# Altium PCB Day10F206.PCBDOC
Units mm, origin at the board's own origin, x right, y up, seen from the top; angles counter-clockwise.
Board outline 152.4 x 101.6 mm, 2 copper layers (Top Layer, Bottom Layer); 39 components, 22 nets, 97 pads, 0 vias.
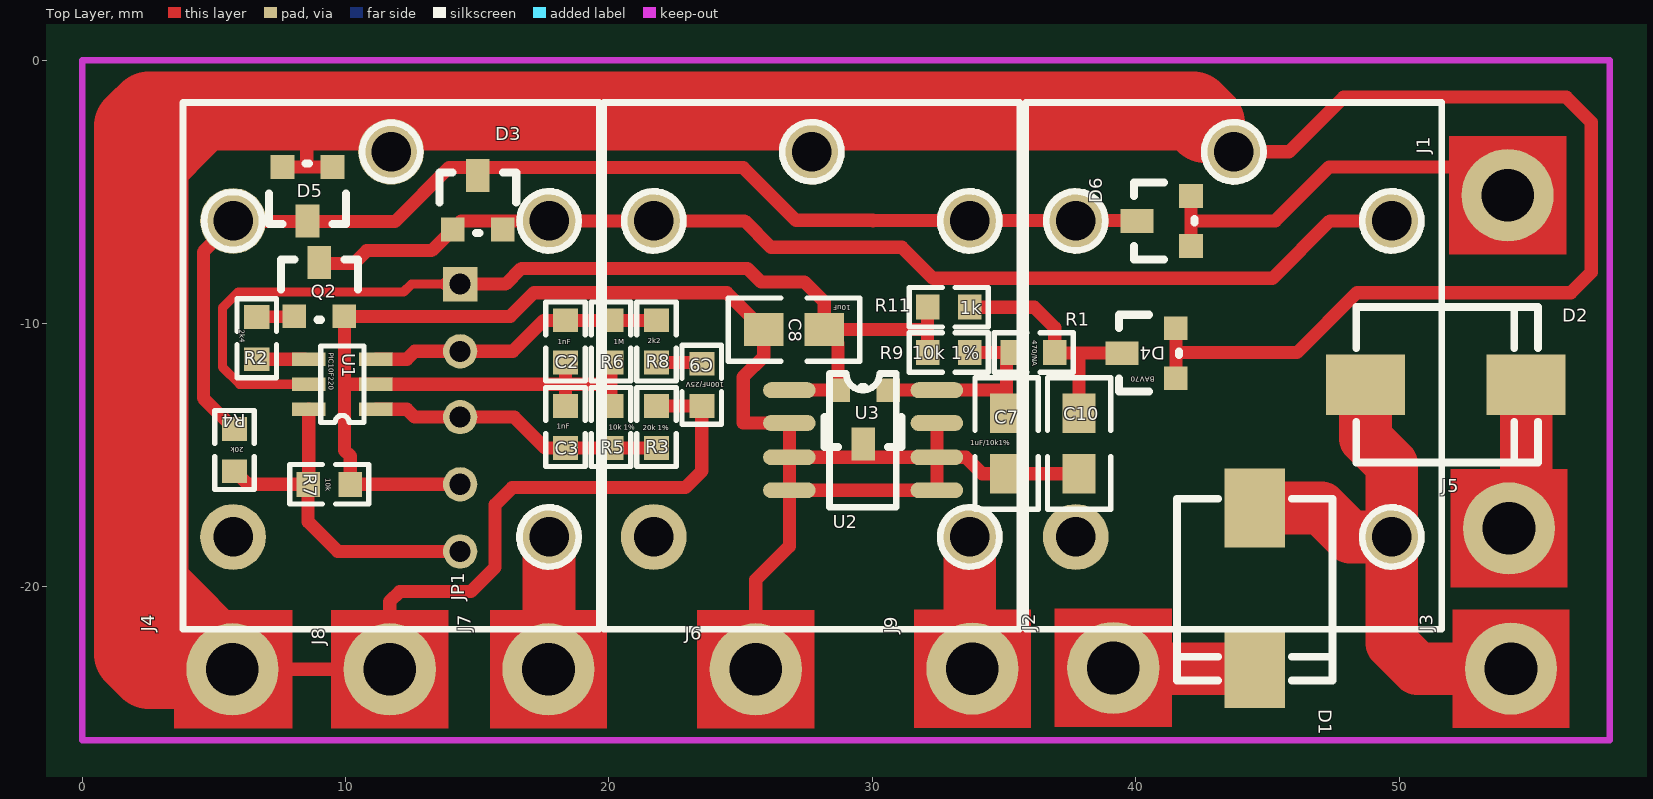
[diagram p0: Top Layer view]
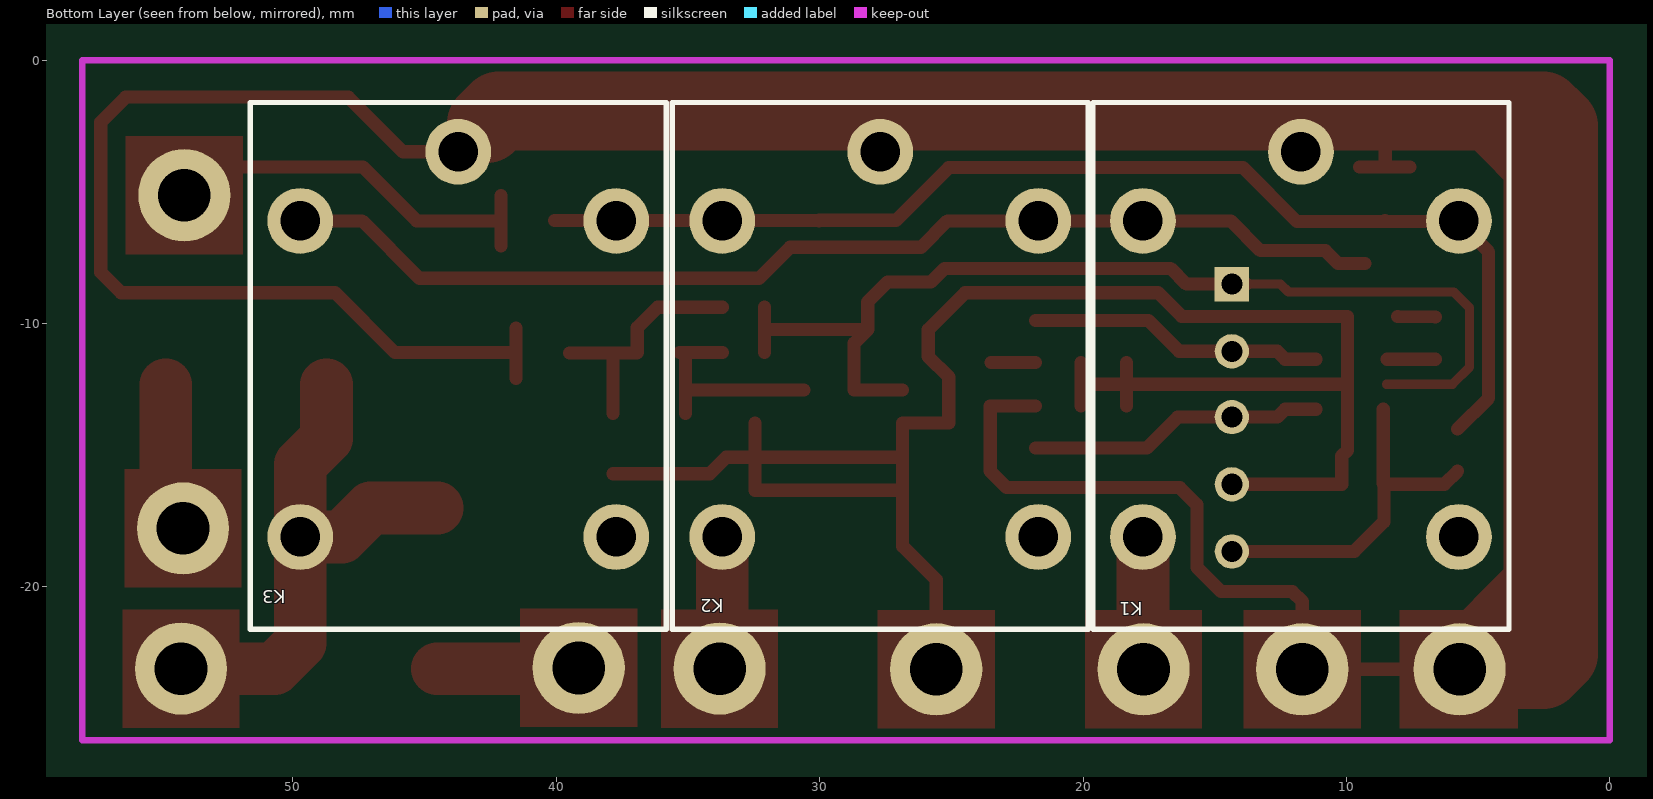
[diagram p1: Bottom Layer view, seen from below]

## Layer stack, top to bottom
Top Layer: signal copper 0.0356
Dielectric: dielectric 0.32, FR-4, Dk 4.8
Bottom Layer: signal copper 0.0356

## Board outline
-23.725,-60.75 128.675,-60.75 128.675,40.85 -23.725,40.85

## Design rules (kind name [scope] priority, off if disabled: settings)
Clearance [All] p1: gap=0.3
ComponentClearance [All] p1 off: gap=0 collisioncheckmode=3 verticalgap=0.254 showdistances=FALSE
FabricationTestPointUsage TestPointUsage [All] p1: valid=0 allowmultiple=FALSE
FabricationTestpoint Testpoint [All] p1: side=3 testpointundercomponent=TRUE minsize=1.016 maxsize=2.54 preferedsize=1.524 minholesize=0 maxholesize=1.016 preferedholesize=0.813 testpointgrid=0.025 allowsidetop=TRUE allowsidebottom=TRUE usegrid=TRUE gridtolerance=0
PolygonConnect [All] p1: connectstyle=Relief reliefconductorwidth=0.254 reliefentries=4 polygonreliefangle="90 Angle"
RoutingVias [All] p1: holewidth=0.711 width=1.27 viastyle="Through Hole" minholewidth=0.711 minwidth=1.27 maxholewidth=0.711 maxwidth=1.27
SilkscreenOverComponentPads [All] p1: minsilkscreentomaskgap=0.254
SolderMaskExpansion [All] p1: expansion=0.102
Width [All] p1: maxlimit=3 minlimit=0.25 preferedwidth=0.35 bottomlayer_prefwidth=0.25 minimp=50.000000 maximp=50.000000 favimp=50.000000
24 further rules are at their usual default settings.

## Components (designator, comment, footprint, x,y, rotation, side; value= is the part's Value field where it differs from the comment)
C2 "1nF" 0603 18.35,-10.675 r270 top
C3 "1nF" 0603 18.35,-13.925 r270 top
C7 "1uF/10k1%" 0805 35.1,-13.4 r270 top
C8 "10uF" 0805 28.175,-10.225 r180 top
C9 "100nF/25V" 0603 23.525,-12.325 r90 top
C10 "1uF/25V" 0805 37.85,-13.4 r270 top (schematic designator C?)
D1 "DIODE" SMC 44.525,-23.1 r270 top
D2 "DIODE" SMC 54.825,-12.325 r0 top
D3 "BAV70" SOT-23 14.065,-6.425 r0 top
D4 "BAV70" SOT-23 41.525,-12.075 r90 top
D5 "BAV70" SOT-23 9.5,-4.05 r180 top
D6 "BAV70" SOT-23 42.1,-7.05 r90 top
J1 "CON1" "SIP1 - WIRE" 54.125,-5.125 r180 top
J2 "CON1" "SIP1 - WIRE" 39.15,-23.075 r180 top
J3 "CON1" "SIP1 - WIRE" 54.25,-23.1 r180 top
J4 "CON1" "SIP1 - WIRE" 5.7,-23.125 r180 top
J5 "CON1" "SIP1 - WIRE" 54.175,-17.775 r90 top (schematic designator J?)
J6 "CON1" "SIP1 - WIRE" 25.575,-23.125 r90 top (schematic designator J?)
J7 "CON1" "SIP1 - WIRE" 17.7,-23.125 r180 top
J8 "CON1" "SIP1 - WIRE" 11.675,-23.125 r180 top
J9 "CON1" "SIP1 - WIRE" 33.8,-23.1 r180 top
JP1 "HEADER 5" "SIP5 - PGM" 14.35,-8.5 r270 top
K1 "RELAY-LF" RELAY5PIN 17.725,-6.1 r180 bottom
K2 "RELAY-RF" RELAY5PIN 33.7,-6.1 r180 bottom
K3 "RELAY-GABARIT" RELAY5PIN 49.725,-6.1 r180 bottom
Q2 "MMBT2222A" SOT-23 8.05,-9.725 r0 top (schematic designator Q?)
R1 "470/NA" 0603 36.125,-11.1 r0 top
R2 "2k4" 0603 6.625,-10.55 r270 top
R3 "20k 1%" 0603 21.8,-13.925 r270 top
R4 "20k" 0603 5.775,-14.8 r90 top
R5 "10k 1%" 0603 20.075,-13.925 r270 top
R6 "1M" 0603 20.075,-10.675 r90 top
R7 "10k" 0603 9.375,-16.1 r180 top
R8 "2k2" 0603 21.8,-10.675 r270 top
R9 "10k 1%" 0603 32.9,-11.1 r180 top
R11 "1k" 0603 32.9,-9.375 r0 top
U1 "PIC10F220" "SOT23 - 6" 11.15,-13.25 r90 top
U2 "VOLTREG" "SO-8 VOLTREG" 26.85,-12.525 r0 top
U3 "TL431" SOT-23 30.6,-12.525 r180 top (schematic designator U?)

## Footprints (in the part's own frame and the unit in brackets; to place one, negate y for a bottom-side part, rotate by r counter-clockwise, add the part's x,y. Pads: shape width x height; smd on the part's side, far side on the other; paste and mask are expansions set on the pad)
0603 [mm]
  rect 0.9x0.95 smd: 1(-0.8,0) 2(0.8,0)
  silkscreen extent -1.5,-0.75 1.5,0.75
0805 [mm]
  rect 1.5x1.25 smd: 1(0,0) 2(2.3,0)
  silkscreen extent -1.35,-1.2 3.65,1.2
RELAY5PIN [mm]
  round 2.5 hole 1.5: 1(6,2.625) 2(0,-12) 3(12,-12) 4(12,0) 5(0,0)
  silkscreen extent -1.9,-15.5 13.9,4.5
"SIP1 - WIRE" [mm]
  round 3.5 hole 2: 1(0,0)
"SIP5 - PGM" [mm]
  rect 1.3x1.3 hole 0.8: 1(0,0)
  round 1.3 hole 0.8: 2(2.55,0) 3(5.05,0) 4(7.6,0) 5(10.15,0)
SMC [mm]
  rect 3x2.3 smd: 1(0,0) 2(-6.1,0)
  silkscreen extent -6.45,-2.95 0.45,2.95
"SO-8 VOLTREG" [mm]
  oval 2x0.6 smd: 1(5.6,0) 2(0,-3.8) 2(0,-2.55) 2(0,-1.25) 2(5.6,-3.8) 2(5.6,-2.55) 2(5.6,-1.25) 3(0,0)
  silkscreen extent 1.52,-4.44 4.06,0.64
"SOT23 - 6" [mm]
  rect 0.508x1.27 smd: 1(0,0) 2(0.95,0) 3(1.9,0) 4(1.9,2.55) 5(0.95,2.55) 6(0,2.55)
  silkscreen extent -0.5,0.45 2.4,2.1
SOT-23 [mm]
  rect 0.9x0.9 smd: 1(0,0) 3(1.9,0)
  rect 0.9x1.25 smd: 2(0.95,2.05)
  silkscreen extent -0.51,-0.13 2.41,2.16

## Part data
C2 C3 C7 C8 C9 C10: library part CAP, "Capacitor"
D1 D2: "Diode"
D3 D4 D5 D6: library part "DUAL DIODE BAV70"
J1 J2 J3 J4 J5 J6 J7 J8 J9: "Connector"
K1 K2 K3: library part RELAY-SPDT
Q2: library part NPN1, "NPN Transistor"
R1 R2 R3 R4 R5 R6 R7 R8 R9 R11: library part RES1
U1: library part PIC10F206

## Nets (pads, with @x,y where several pads share a name; then routed paths per layer and width w, separated by ;. In a path a pad name is that pad's centre, name@x,y a point inside that pad or via, vN(x,y) a via of type N, cw(c..) or ccw(c..) an arc to the next point about the centre after c; other vN are vias at no path point)
B: Q2.1 R2.1 | length 1.4
  Top Layer w0.5: R2.1 Q2.1
COIL: D3.1 D3.3 K1.5 K2.4 K3.5 Q2.2 | length 42.9
  Top Layer w0.5: Q2.2@9.29,-7.718 10.307,-7.718 10.8,-7.225 13.265,-7.225 14.39,-6.1 25.15,-6.1 26.15,-7.1 31.125,-7.1 32.3,-8.275 45.2,-8.275 47.375,-6.1 K3.5@49.75,-6.1
CONTACT: JP1.5 R4.1 R7.2 U1.6 | length 13.5
  Top Layer w0.5: R4.1 6.275,-16.1 R7.2 ; U1.6 8.6,-16.075 R7.2 ; JP1.5 9.7,-18.65 8.575,-17.525 R7.2
GAB: D1.2 D2.2 J3.1 K3.2 | length 20.8
  Top Layer w2: D1.2 47.05,-17 48.15,-18.1 K3.2 ; D2.2 48.725,-14.35 49.725,-15.35 K3.2 ; J3.1 50.7,-23.1 49.725,-22.125 K3.2
GND: C2.2 C3.1 C7.2 C8.2 C10.2 J6.1 JP1.4 Q2.3 R5.1 R6.1 R7.1 U1.2 U2.2 U3.2 | length 76.1
  Top Layer w0.5: 9.98,-12.3 12.975,-12.3 ; 12.65,-12.3 20.075,-12.3 ; JP1.4 R7.1 10.175,-15.025 9.955,-14.805 9.955,-14.545 9.955,-9.725 16.25,-9.725 17.15,-8.825 24.475,-8.825 C8.2 25.875,-11.25 25.1,-12.025 25.1,-13.775 26.85,-13.775 26.85,-18.45 25.575,-19.725 J6.1 ; C3.1 C2.2 ; R5.1 R6.1 ; U2.2@26.85,-16.325 32.45,-16.325 U2.2@32.45,-13.775 ; U2.2@26.85,-15.075 33.55,-15.075 34.175,-15.7 C10.2
IN: C10.1 D4.2 R1.2 R11.2 | length 9.3
  Top Layer w0.5: R11.2 36.15,-9.375 36.925,-10.15 R1.2 ; R1.2@36.935,-11.11 D4.2@39.493,-11.11 ; C10.1 37.85,-11.135
KL15: D6.1 D6.3 J1.1 | length 13.4
  Top Layer w0.5: D6.1 D6.3@42.1,-5.145 ; 42.1,-6.1 45.3,-6.1 47.35,-4.05 52.7,-4.05
LF: J7.1 K1.2 | length 5.9
  Top Layer w2: J7.1@17.725,-23.875 K1.2@17.725,-17.95
LG: D1.1 J2.1 | length 5.4
  Top Layer w2: J2.1 39.175,-23.1 D1.1
MEASURE: C3.2 JP1.3 R3.2 R5.2 U1.1 | length 11.3
  Top Layer w0.5: U1.1 12.325,-13.25 12.625,-13.55 16.4,-13.55 17.575,-14.725 C3.2 R3.2
NetC9_2: C9.2 R8.2 | length 1.7
  Top Layer w0.5: R8.2 C9.2@23.5,-11.475
NetK1_3: 
NetK2_3: K2.3
NetK3_3: K3.3
OUT: R2.2 U1.4 | length 1.8
  Top Layer w0.5: R2.2 U1.4@8.45,-11.35
PEAK: C2.1 JP1.2 R6.2 R8.1 U1.3 | length 11.3
  Top Layer w0.5: U1.3 12.325,-11.35 12.625,-11.05 16.35,-11.05 17.525,-9.875 R6.2 R8.1
POWER: C9.1 D4.1 D4.3 D5.1 D5.3 J4.1 J8.1 K1.1 K2.1 K3.1 R3.1 | length 211.7
  Top Layer w0.5: J4.1 J8.1 ; D5.3@7.595,-4.05 D5.1 ; 8.525,-4.05 8.525,-2.8 ; J8.1@11.675,-23.15 J8.1 ; R3.1 C9.1 23.525,-15.6 22.9,-16.225 16.325,-16.225 15.675,-16.875 15.675,-19.25 14.75,-20.175 12.05,-20.175 11.675,-20.55 J8.1 ; D4.1 D4.3@41.525,-10.17 ; 41.525,-11.1 46.125,-11.1 48.4,-8.825 56.525,-8.825 57.3,-8.05 57.3,-2.352 56.348,-1.4 47.9,-1.4 ; K3.1 45.825,-3.475 47.9,-1.4 ; 49.45,-1.4 47.9,-1.4
  Top Layer w2: 2.175,-2.277 2.175,-3.525 2.175,-4.975 2.525,-4.625 4.75,-2.4 42.65,-2.4 K3.1
  Top Layer w3: 2.175,-19.6 2.175,-22.775 ; 2.175,-3.525 2.525,-3.175 ; 2.2,-19.625 2.525,-19.95 ; 2.2,-5.425 2.275,-5.35 ; 42.65,-2.4 42.177,-1.927 3.773,-1.927 ; 2.175,-22.775 1.95,-22.55 1.95,-2.502 2.175,-2.277 2.525,-1.927 ; 2.175,-22.775 2.525,-23.125 J4.1 2.525,-19.95 ; 2.525,-19.95 2.525,-4.625 2.525,-3.175 ; 2.525,-3.175 3.773,-1.927 ; 2.525,-3.175 2.525,-1.927 ; 2.525,-1.927 3.773,-1.927
REF: C7.1 R1.1 R9.1 U2.1 U3.1 | length 8.4
  Top Layer w0.5: U3.1 35.1,-12.525 ; R9.1 R1.1 ; C7.1 R1.1@35.1,-11.1
RELAY: D3.2 D5.2 D6.2 K1.4 K2.5 K3.4 R4.2 | length 45.3
  Top Layer w0.5: 4.6,-12.4 4.6,-12.825 ; R4.2 4.6,-12.825 ; D5.2@8.492,-6.125 D5.2@8.535,-6.082 ; D3.2@15.04,-4.075 25.1,-4.075 27.1,-6.075 30.025,-6.075 ; D3.2@15.04,-4.068 13.932,-4.068 11.875,-6.125 5.75,-6.125 4.6,-7.275 4.6,-12.825 ; 30.025,-6.096 D6.2@40.068,-6.085
RF: J9.1 K2.2 | length 5.9
  Top Layer w2: J9.1@33.7,-23.95 K2.2
RG: D2.1 J5.1 | length 5.7
  Top Layer w2: J5.1 54.825,-17.125 D2.1
VCC: C8.1 JP1.1 R9.2 R11.1 U1.5 U2.3 U3.3 | length 40.7
  Top Layer w0.35: U1.5@8.475,-12.3 5.975,-12.3 5.325,-11.65 5.325,-9.4 5.925,-8.8 12.2,-8.8 12.5,-8.5 JP1.1@13.8,-8.5
  Top Layer w0.5: JP1.1@13.8,-8.5 16.075,-8.5 16.675,-7.9 25.25,-7.9 25.775,-8.425 27.425,-8.425 28.175,-9.175 C8.1 ; U2.3 28.695,-12.525 28.695,-10.745 C8.1 ; R9.2 R11.1 ; 32.1,-10.2 32.075,-10.225 C8.1
pads on no net: K1.3

## Keep-outs
Keep-Out Layer:
  lines w0.254: 58,-0.025 58,-25.825 0,-25.825 0,0 58,0

## Other copper
Top Layer:
  rectangle net POWER: 9.45,-25.375 13.9,-20.875
  rectangle net RF: 31.575,-25.35 36.025,-20.85
  rectangle net KL15: 51.9,-7.375 56.35,-2.875
  rectangle net LF: 15.475,-25.375 19.925,-20.875
  rectangle net POWER: 3.475,-25.375 7.975,-20.875
  rectangle net GND: 23.35,-25.375 27.8,-20.875
  rectangle net LG: 36.925,-25.325 41.375,-20.825
  rectangle net GAB: 52.025,-25.35 56.475,-20.85
  rectangle net RG: 51.95,-20.025 56.4,-15.525

## Silkscreen, mask and mechanical layers (free items; w line width, h text height)
Top Overlay:
  circle w0.25: c49.725,-18.1 r1.125
  circle w0.25: c49.725,-6.1 r1.125
  circle w0.25: c43.725,-3.475 r1.127
  circle w0.25: c37.725,-6.1 r1.123
  circle w0.25: c33.7,-6.1 r1.125
  circle w0.25: c27.7,-3.475 r1.126
  circle w0.25: c33.7,-18.1 r1.125
  circle w0.25: c17.725,-18.1 r1.125
  circle w0.25: c11.725,-3.475 r1.101
  circle w0.25: c21.7,-6.1 r1.125
  circle w0.25: c17.725,-6.1 r1.125
  circle w0.25: c5.725,-6.1 r1.098
  lines w0.254: 3.825,-21.6 3.825,-1.6 19.625,-1.6 19.625,-21.6 3.825,-21.6 ; 19.8,-21.6 19.8,-1.6 35.6,-1.6 35.6,-21.6 19.8,-21.6 ; 35.825,-21.6 35.825,-1.6 51.625,-1.6 51.625,-21.6 35.825,-21.6
Top Solder:
  rectangle: 3.475,-25.375 5.7,-20.875
  rectangle: 3.775,-3.5 44.2,-0.375
  rectangle: 0.45,-9.75 3,-2.425
  rectangle: 0.325,-25.375 3.925,-0.425